# Altium PCB H_BRIGDE.PcbDoc
Units mil, origin at the board's own origin, x right, y up, seen from the top; angles counter-clockwise.
Board outline 6000 x 4000 mil, 2 copper layers (Top Layer, Bottom Layer); 53 components, 59 nets, 132 pads, 0 vias.
Unrouted connection lines stored in the file: 57.
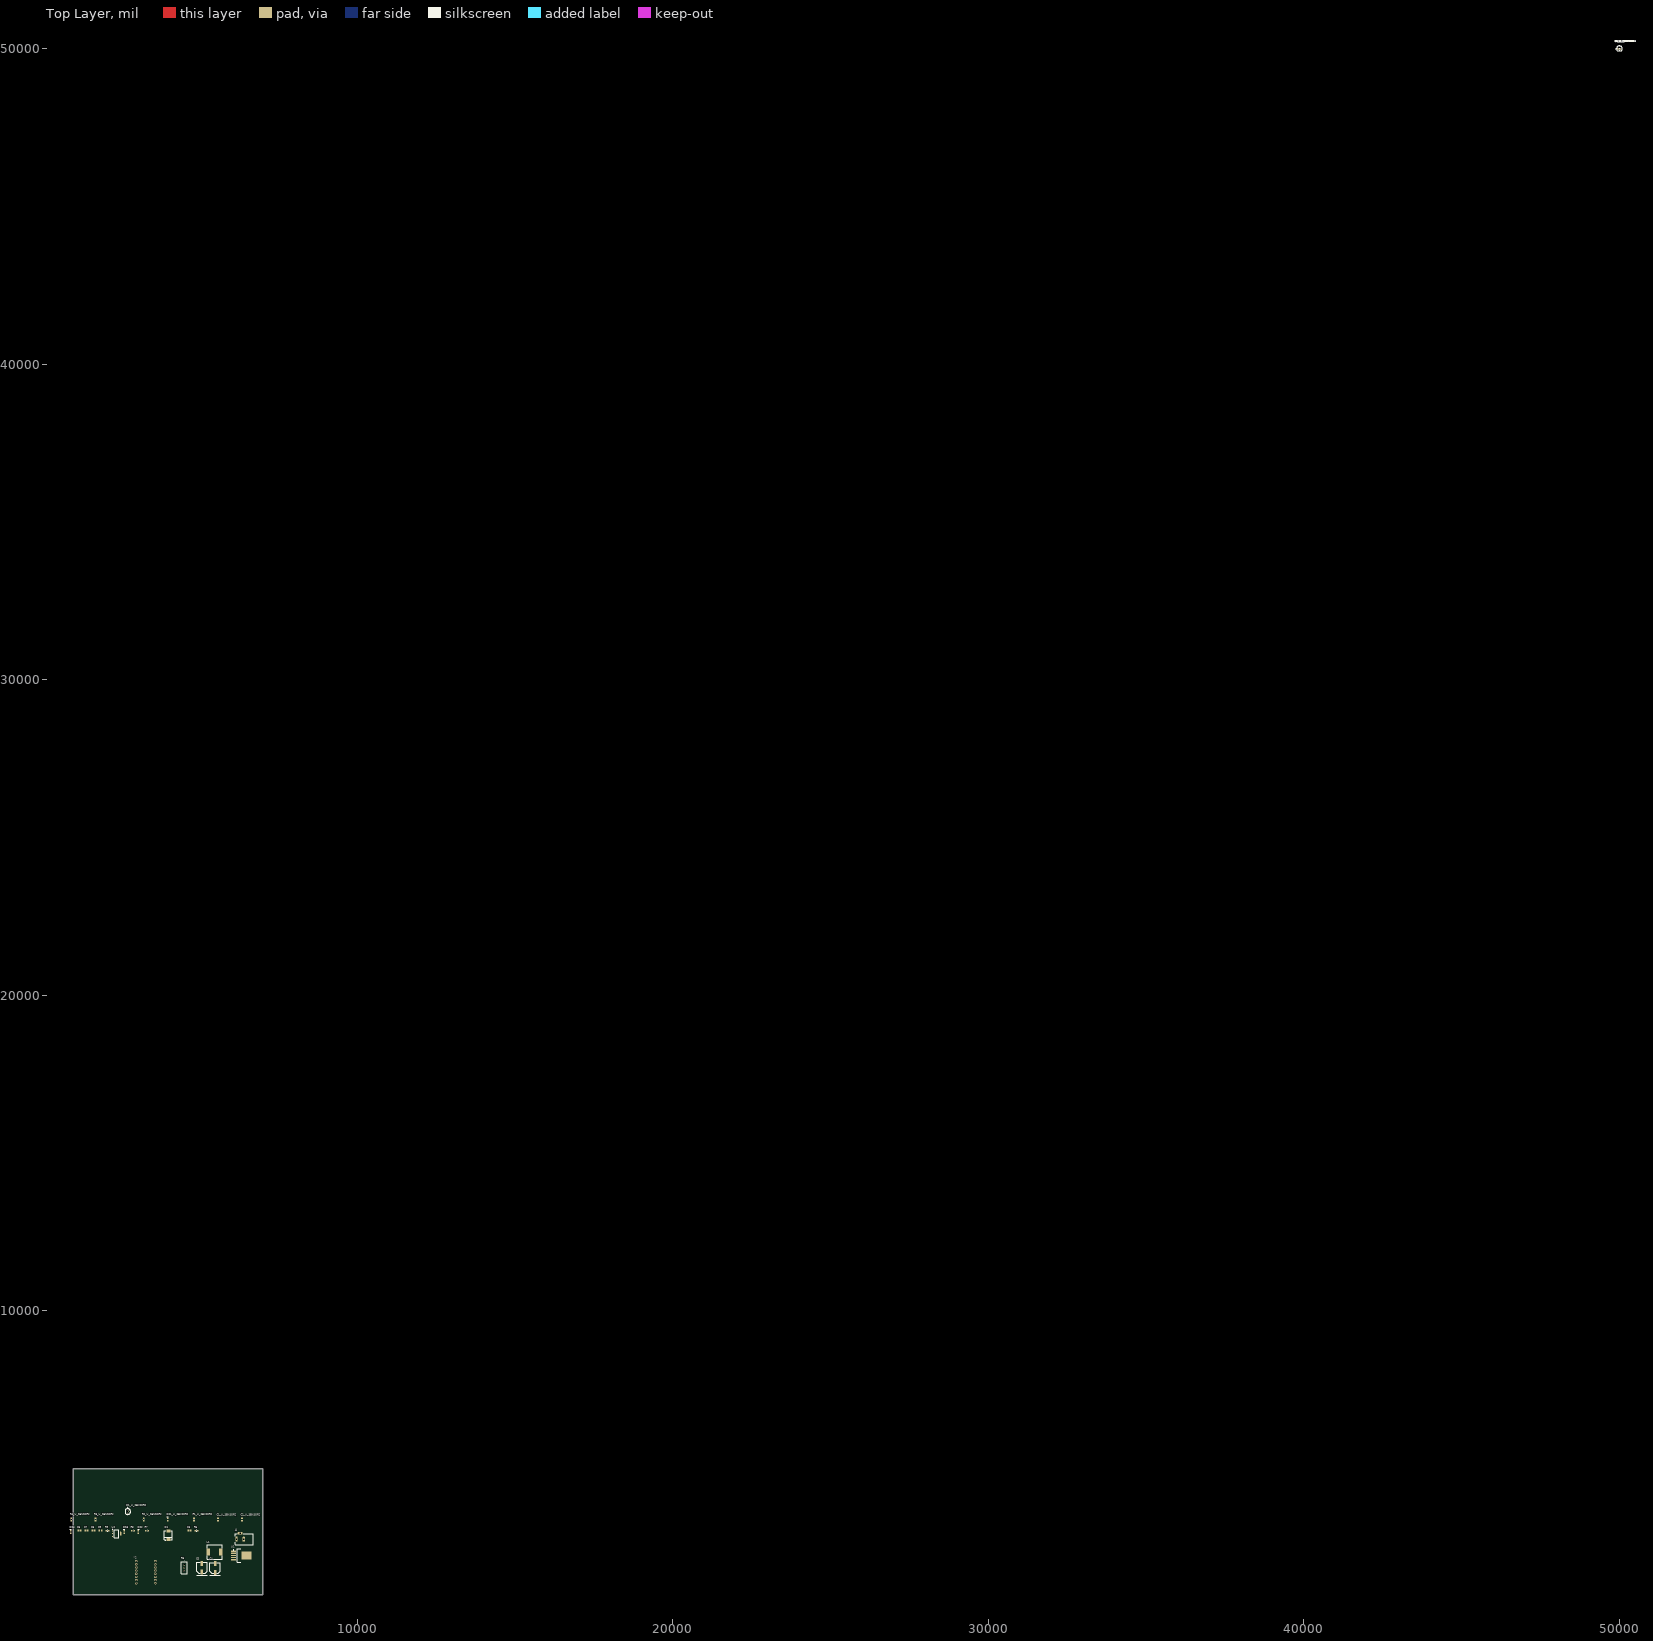
[diagram p0: Top Layer view]
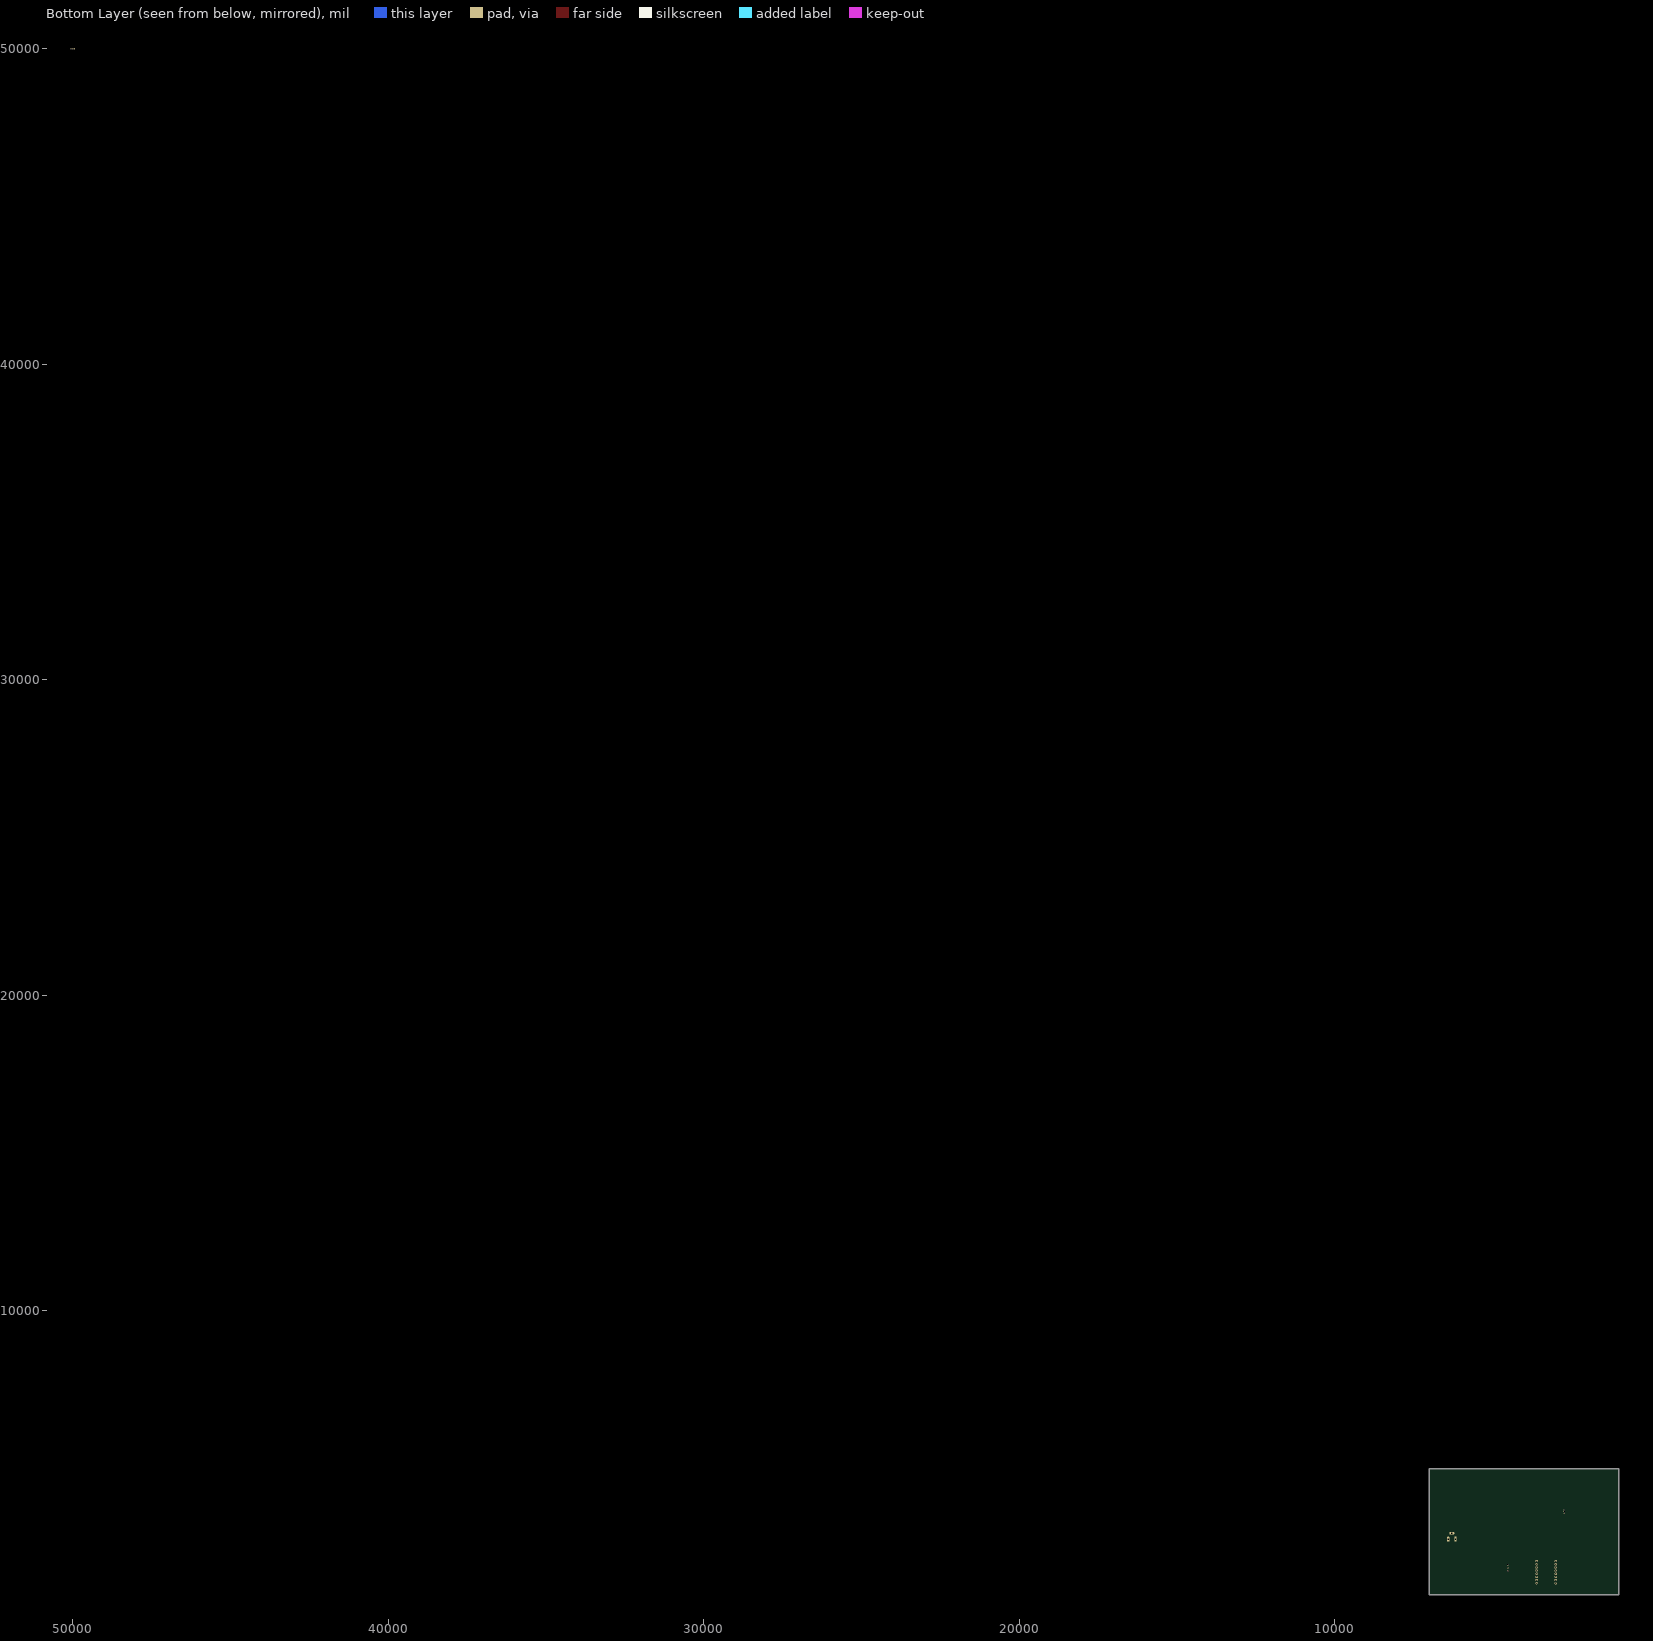
[diagram p1: Bottom Layer view, seen from below]

## Layer stack, top to bottom
Top Solder: solder mask 0.4, Solder Resist, Dk 3.5
Top Layer: signal copper 1.4
Dielectric 1: dielectric 12.6, FR-4, Dk 4.8
Bottom Layer: signal copper 1.4
Bottom Solder: solder mask 0.4, Solder Resist, Dk 3.5

## Board outline
1000,1000 7000,1000 7000,5000 1000,5000

## Design rules (kind name [scope] priority, off if disabled: settings)
Clearance [All] p1: gap=10 ignorepadtopadclearanceinfootprint=FALSE
PolygonConnect [All] p1: connectstyle=Relief reliefconductorwidth=10 reliefentries=4 polygonreliefangle="90 Angle" airgapwidth=10
RoutingVias [All] p1: holewidth=28 width=50 viastyle="Through Hole" minholewidth=28 minwidth=50 maxholewidth=28 maxwidth=50
SolderMaskExpansion [All] p1: expansion=4 istentingtop=FALSE
Width [All] p1: maxlimit=10 minlimit=10 preferedwidth=10
30 further rules are at their usual default settings.

## Classes and differential pairs
channel class SENSOR: U_SENSOR1 U_SENSOR2 U_SENSOR3 U_SENSOR4
component class U_SENSOR4: C1_U_SENSOR4 C2_U_SENSOR4 DS1_U_SENSOR4 Q1_U_SENSOR4 Q2_U_SENSOR4 R1_U_SENSOR4 R2_U_SENSOR4 R3_U_SENSOR4 R4_U_SENSOR4
component class U_SENSOR3: C1_U_SENSOR3 C2_U_SENSOR3 DS1_U_SENSOR3 Q1_U_SENSOR3 Q2_U_SENSOR3 R1_U_SENSOR3 R2_U_SENSOR3 R3_U_SENSOR3 R4_U_SENSOR3
component class U_SENSOR2: C1_U_SENSOR2 C2_U_SENSOR2 DS1_U_SENSOR2 Q1_U_SENSOR2 Q2_U_SENSOR2 R1_U_SENSOR2 R2_U_SENSOR2 R3_U_SENSOR2 R4_U_SENSOR2
component class U_SENSOR1: C1_U_SENSOR1 C2_U_SENSOR1 DS1_U_SENSOR1 Q1_U_SENSOR1 Q2_U_SENSOR1 R1_U_SENSOR1 R2_U_SENSOR1 R3_U_SENSOR1 R4_U_SENSOR1
component class MCU_SIGNAL: *1 ACC1 P1
component class Designator: C3 C4 C5 C6 C7 C8 C9 D1 DS2 DS3 DS4 J3 J4 L1 R5 R6 R7 R8 R9 S1 U1 U2

## Components (designator, comment, footprint, x,y, rotation, side; value= is the part's Value field where it differs from the comment)
*2 "Component_1" PCBComponent_1 2996.06,2070 r0 top
C1_U_SENSOR1 "100nF" CAPC2013X135X45LL10T25 49999.5,49999.5 r0 top (schematic designator C1)
C1_U_SENSOR2 "100nF" CAPC2013X135X45LL10T25 5580,3390 r90 top (schematic designator C1)
C1_U_SENSOR3 "100nF" CAPC2013X135X45LL10T25 49999.5,49999.5 r0 top (schematic designator C1)
C1_U_SENSOR4 "100nF" CAPC2013X135X45LL10T25 49999.5,49999.5 r0 top (schematic designator C1)
C2_U_SENSOR1 "100nF" CAPC2013X135X45LL10T25 49999.5,49999.5 r0 top (schematic designator C2)
C2_U_SENSOR2 "100nF" CAPC2013X135X45LL10T25 6340,3390 r90 top (schematic designator C2)
C2_U_SENSOR3 "100nF" CAPC2013X135X45LL10T25 49999.5,49999.5 r0 top (schematic designator C2)
C2_U_SENSOR4 "100nF" CAPC2013X135X45LL10T25 49999.5,49999.5 r0 top (schematic designator C2)
C3 "3.3nF" CAPC2013X135X45LL10T25 4685,3035 r0 top
C4 "470uF-16V" PNSC-FK-V-F_V 5495,1854.76 r90 top
C5 "220uF-35V" PNSC-FK-V-F_V 5070,1859.76 r90 top
C6 "100nF" CAPC2013X135X45LL10T25 1200,3035 r0 top
C7 "100nF" CAPC2013X135X45LL10T25 1420,3035 r0 top
C8 "100nF" CAPC2013X135X45LL10T25 1640,3035 r0 top
C9 "100nF" CAPC2013X135X45LL10T25 1860,3035 r0 top
D1 "SS54" FP-SMC-MFG 4010,2895 r90 top value=300pF
DS1_U_SENSOR1 "TSHA500" AVAG-HSMX-C170_V 49999.5,49999.5 r0 top (schematic designator DS1)
DS1_U_SENSOR2 "TSHA500" AVAG-HSMX-C170_V 3985,3385 r90 top (schematic designator DS1)
DS1_U_SENSOR3 "TSHA500" AVAG-HSMX-C170_V 49999.5,49999.5 r0 top (schematic designator DS1)
DS1_U_SENSOR4 "TSHA500" AVAG-HSMX-C170_V 49999.5,49999.5 r0 top (schematic designator DS1)
DS2 "White_Led" AVAG-HSMX-C170_V 3060,2995 r90 top
DS3 "White_Led" AVAG-HSMX-C170_V 2610,2995 r90 top
DS4 "White_Led" AVAG-HSMX-C170_V 915,2995 r90 top
J4 "JackDC" 694106301002 6420,2765 r90 top
L1 "68uH-3.2A" SUMI-CDRH127_V 5475,2360 r270 top
Q1_U_SENSOR1 "BS170" ONSC-TO-92-3-29-11 49999.5,49999.5 r0 top (schematic designator Q1)
Q1_U_SENSOR2 "BS170" ONSC-TO-92-3-29-11 2720,3640 r270 top (schematic designator Q1)
Q1_U_SENSOR3 "BS170" ONSC-TO-92-3-29-11 49999.5,49999.5 r0 top (schematic designator Q1)
Q1_U_SENSOR4 "BS170" ONSC-TO-92-3-29-11 49999.5,49999.5 r0 top (schematic designator Q1)
R1_U_SENSOR1 "1K" RESC2013X60X35ML10T20 49999.5,49999.5 r0 top (schematic designator R1)
R1_U_SENSOR2 "1K" RESC2013X60X35ML10T20 4820,3395 r90 top (schematic designator R1)
R1_U_SENSOR3 "1K" RESC2013X60X35ML10T20 49999.5,49999.5 r0 top (schematic designator R1)
R1_U_SENSOR4 "1K" RESC2013X60X35ML10T20 49999.5,49999.5 r0 top (schematic designator R1)
R2_U_SENSOR1 "1K" RESC2013X60X35ML10T20 49999.5,49999.5 r0 top (schematic designator R2)
R2_U_SENSOR2 "1K" RESC2013X60X35ML10T20 3230,3395 r90 top (schematic designator R2)
R2_U_SENSOR3 "1K" RESC2013X60X35ML10T20 49999.5,49999.5 r0 top (schematic designator R2)
R2_U_SENSOR4 "1K" RESC2013X60X35ML10T20 49999.5,49999.5 r0 top (schematic designator R2)
R3_U_SENSOR1 "1K" RESC2013X60X35ML10T20 49999.5,49999.5 r0 top (schematic designator R3)
R3_U_SENSOR2 "1K" RESC2013X60X35ML10T20 1705,3395 r90 top (schematic designator R3)
R3_U_SENSOR3 "1K" RESC2013X60X35ML10T20 49999.5,49999.5 r0 top (schematic designator R3)
R3_U_SENSOR4 "1K" RESC2013X60X35ML10T20 49999.5,49999.5 r0 top (schematic designator R3)
R4_U_SENSOR1 "1K" RESC2013X60X35ML10T20 49999.5,49999.5 r0 top (schematic designator R4)
R4_U_SENSOR2 "1K" RESC2013X60X35ML10T20 935,3395 r90 top (schematic designator R4)
R4_U_SENSOR3 "1K" RESC2013X60X35ML10T20 49999.5,49999.5 r0 top (schematic designator R4)
R4_U_SENSOR4 "1K" RESC2013X60X35ML10T20 49999.5,49999.5 r0 top (schematic designator R4)
R5 "2K" RESC2013X60X35ML10T20 4905,3035 r0 top
R6 "3296W-1-504LF" FP-3296W-MFG 4515.2,1860 r90 top value=500kΩ
R7 "2K" RESC2013X60X35ML10T20 3340,3035 r0 top
R8 "1k" RESC2013X60X35ML10T20 2895,3035 r0 top
R9 "2K" RESC2013X60X35ML10T20 2080,3035 r0 top
U1 "LM2596SX-ADJ/NOPB" KTT0005B_L 6320,2250 r0 top
U2 "AMS1117-3.3" FP-AMS1117-IPC_C 2370,2940 r0 top

## Footprints (in the part's own frame and the unit in brackets; to place one, negate y for a bottom-side part, rotate by r counter-clockwise, add the part's x,y. Pads: shape width x height; smd on the part's side, far side on the other; paste and mask are expansions set on the pad)
694106301002 [mm] "DC Power Jack Right Angled(6.4)"
  rrect50% 4x1.8 hole 0.8 square: 1(0,6.35) 2(0,0.55)
  rrect50% 1.8x4 hole 0.8 square: 3(4.8,3.35)
  silkscreen extent -4.5,-7.25 4.5,7.25, body extent -4.5,-7.25 5,7.25, height 10.75
AVAG-HSMX-C170_V [mm] "SMD, 2-Leads, Body 2x1.25mm, Height 0.8mm"
  rect 1.2x1.2 smd: 1(-1.05,0) 2(1.05,0)
  silkscreen extent 2.15,-0.63 2.15,0.63, body extent -1,-0.63 1,0.63, height 0.8
CAPC2013X135X45LL10T25 [mm] "Chip Capacitor, 2-Leads, Body 2.10x1.35mm, IPC High Density"
  rect 1.4x1.5 smd: 1(-0.95,0) 2(0.95,0)
  body extent -1.05,-0.67 1.05,0.67, height 1.35
FP-3296W-MFG [mm]
  rect 1.2x1.2 hole 0.7 paste-2539.97 mask+0: 1(2.54,0.005)
  round 1.2 hole 0.7 paste-2539.97 mask+0: 2(0,0.005) 3(-2.54,0.005)
  silkscreen extent -4.89,-2.48 5.77,2.48, body extent -4.99,-2.58 4.99,2.58, height 0.25
FP-AMS1117-IPC_C [mm]
  rect 1.004x0.872 smd paste+0 mask+0: 1(-3.295,2.29)
  rrect100% 1.004x0.872 smd paste+0 mask+0: 2(-3.295,0) 3(-3.295,-2.29)
  rrect87% 1.004x3.182 smd paste+0 mask+0: 4(3.295,0)
  silkscreen extent -3.42,-3.25 1.75,3.62, body extent -3.9,-3.35 3.9,3.35, height 0.25
FP-SMC-MFG [mm]
  rect 2.5x3.3 smd paste+0 mask+0: 1(-3.45,0) 2(3.45,0)
  silkscreen extent -4.25,-3.11 3.55,3.11, body extent -4.8,-3.21 4.8,3.21, height 0.25
KTT0005B_L [mm] "DPAK, 5-Leads, Body 10.65x9.65mm, Pitch 1.7mm, IPC High Density"
  rrect11% 3.85x0.95 smd: 1(-6.2,3.4) 2(-6.2,1.7) 3(-6.2,0) 4(-6.2,-1.7) 5(-6.2,-3.4)
  rrect2% 7.9x6.4 smd: 6(4.15,0)
  silkscreen extent -6.32,-5.35 -0.2,5.35, body extent -3.2,-5.32 6.45,5.33, height 4.83
ONSC-TO-92-3-29-11 [mm] "TO, 3-Leads, Body Dia 4.7mm, Pitch 1.27mm"
  rect 1.05x1.05 hole 0.8: 1(-1.27,0)
  round 1.05 hole 0.8: 2(0,0) 3(1.27,0)
  silkscreen extent -3.07,-1.34 2.35,2.35, body extent -2.35,-1.33 2.36,2.36, height 7.87
PCBComponent_1 [mm]
  oval 1.924x1.724 hole 1.299: 1(0,0) 2(0,-2.54) 3(0,-5.08) 4(0,-7.62) 5(0,-10.16) 6(0,-12.7) 7(0,-15.24) 8(0,-17.907) 9(15.34,-17.78) 10(15.34,-15.24) 11(15.34,-12.7) 12(15.34,-10.16) 13(15.34,-7.62) 14(15.34,-5.08) 15(15.34,-2.54) 16(15.34,0)
  body extent -2.41,-19.18 17.91,1.14, height 3.01
PNSC-FK-V-F_V [mm] "CAPAE, 2-Leads, Body 8.50x8.50mm"
  rect 4x2 smd: 1(-3.55,0) 2(3.55,0)
  silkscreen extent -6.05,-4.25 4.25,4.25, body extent -5,-4.25 5,4.25, height 10.5
RESC2013X60X35ML10T20 [mm] "Chip Resistor, 2-Leads, Body 2.1x1.35mm, IPC Low Density"
  rect 1.2x1.45 smd: 1(-1,0) 2(1,0)
  silkscreen extent -0.1,-0.63 0.1,0.63, body extent -1.05,-0.68 1.05,0.67, height 0.6
SUMI-CDRH127_V [mm] "SMD, 2-Leads, Body 12x12mm"
  rect 5.4x2.9 smd: 1(0,4.95) 2(0,-4.95)
  silkscreen extent -6,-6 6,6, body extent -6,-6.1 6,6.1, height 8.4

## Part data
C1_U_SENSOR1 C1_U_SENSOR2 C1_U_SENSOR3 C1_U_SENSOR4 C2_U_SENSOR1 C2_U_SENSOR2 C2_U_SENSOR3 C2_U_SENSOR4 C3 C6 C7 C8 C9: library part CMP-1662-00015-2, "Chip Capacitor, 4.7 uF, +/- 10%, 16 V, -55 to 85 degC, 0805 (2012 Metric), RoHS, Tape and Reel", Capacitance="4.7 uF", Case Code (Imperial)=0805, Case Code (Metric)=2012, Max Operating Temperature="85 degC", Min Operating Temperature="-55 degC", Package Quantity=3000, PartNumber=GRM21BR61C475KA88L, Tolerance=10%, Type (Capacitors)=X5R, Voltage Rating="16 V", Case\/Package=0805, ComponentLink1Description="Manufacturer URL", ComponentLink1URL=http://www.murata.com/, ComponentLink2Description=Datasheet, ComponentLink2URL=http://search.murata.co.jp/Ceramy/image/img/A01X/G101/ENG/GRM21BR61C475KA88-01.pdf, DatasheetVersion=03/2016, Height="1.25 mm", Length="2 mm", Mount="Surface Mount", Mounting Technology="Surface Mount", PackageDescription="2-Pin Surface Mount Device, Body 2 x 1.25 mm", PackageReference=0805, Packaging="Tape and Reel", Pins=2, Radiation Hardening=No, REACH SVHC="No SVHC", RoHSCompliant=true, Voltage Rating (DC)="16 V", Width="1.25 mm"
C4 C5: library part CMP-2000-06204-1, "Aluminum Electrolytic Capacitor, 470 uF, +/- 20%, 16 V, 2-Pin SMD (Size Code F), -55 to 105 degC, RoHS, Tape and Reel", Capacitance=470µF, Case Size/Dimension=Ø8x10.2mm, Lifetime@Temperature=2000Hrs@105°C, Manufacturer=Panasonic, Operating Temp Range=-55to+105°C, Operating Temp-Max=105°C, Package Description="2-Pin Electrolytic Aluminum Capacitor, Body 8.3 x 8.3 mm", Package Reference=FK-V-F, Rated Voltage=16V, Ripple Current=600mA, Datasheet URL=http://industrial.panasonic.com/cdbs/www-data/pdf/RDE0000/ABA0000C1181.pdf, Datasheet Version=03/2016, Impedance=0.16O, Manufacturer URL=http://www.panasonic.com/, Mounting Technology=SurfaceMount, Package URL=http://industrial.panasonic.com/cdbs/www-data/pdf/RDE0000/DME0000COL48.pdf, Series=FK, Type=Can
D1: library part CMP-2000-05097-3, "DIODE SCHOTTKY 40V 5A SMC", Capacitance=300pF, Forward Current=5A, Manufacturer="Diodes Inc.", Manufacturer Part Number=B540C-13-F, Max Junction Temp=+150°C, Max Repetitive Reverse Voltage=40V, Max Surge Forward Current=100A, Package=SMC, Peak Reverse Current=0.5mA, Temperature="-55°C to +150°C", Temperature Range Low=-55°C, Automotive=No, Automotive Grade=NA, Category=Diode, ComponentLink2Description=Datasheet, ComponentLink2URL=https://www.diodes.com/assets/Datasheets/ds13012.pdf, Device Class L1="Discrete Semiconductors", Device Class L2=Diodes, Device Class L3="Schottky Diodes", Digikey Description="DIODE SCHOTTKY 40V 5A SMC", Footprint Url=https://www.diodes.com/assets/Package-Files/SMC.pdf, Height=2.5mm, Lead Free=Yes, Mouser Description="Diode: Schottky rectifying; SMD; 40V; 5A; SMC; Package: reel, tape", Octopart=https://octopart.com/b540c-13-f-diodes+inc.-325873, Reverse Voltage=40V, RoHS=TRUE, Standoff Height=0.1mm, Temperature Range High=+150°C
DS1_U_SENSOR1 DS1_U_SENSOR2 DS1_U_SENSOR3 DS1_U_SENSOR4 DS2 DS3 DS4: library part CMP-2000-05062-1, "Chip LED, Green, 2.2 V, -40 to 85 degC, 2-Pin SMD, Pb-Free, Tape and Reel", Forward Current If=20mA, Forward Voltage=2.2V, Forward Voltage VF Max=2.6V, LED Colour=Green, Manufacturer=Avago, Operating Temperature Max=85degC, Operating Temperature Min=-30degC, Operating Temperature Range=-30degCto+85degC, Opto Case Style=SMD, Package Description="2-Pin Surface Mount Device, Body 2 x 1.25 mm, Height 0.8 mm", Package Reference=HSMX-C170, Storage Temperature Min=-40degC, Bulb Size=1.25mmx1.4mm, Datasheet URL=https://datasheet.ciiva.com/29280/180495-da-01-en-chip-led-hsmg-c170-gelb-gruen-29280971.pdf, Datasheet Version=Oct-08, Dominant Wavelength=572nm, Dominant Wavelength Typ=572nm, External Depth=0.8mm, External Length / Height=2mm, External Width=1.25mm, Forward Current If Max=20mA, LED Mounting=SMD, LED Type=Standard, Lens Shape=Rectangular, Light Area Height=1mm, Luminous Intensity=15mcd, Luminous Intensity Min=4mcd, Luminous Intensity Typ=15mcd, Manufacturer URL=http://www.avagotech.com/, Mounting Type=SMD, MSL=MSL2A-4weeks, No. of Pins=2, Opto Mounting Orientation=Top, Packaging=CutTape, Peak Forward Current=20mA, Peak Wavelength=570nm, PIV Max=5V, Storage Temperature Max=85degC, SVHC=NoSVHC(16-Jun-2014), Viewing Angle=170deg, Voltage Vf Typ=2.2V, Wavelength Typ=570nm
J4: library part CMP-1502-00188-2, Color=Black, Current Rating=5A, Flammability Rating="UL94 V-0", Insulation Resistance=100MΩ, Max Operating Temperature=85°C, Min Operating Temperature=-40°C, Operating Supply Voltage=24V, Voltage Rating (DC)=20V, Connector Type=Power, Contact Gender=Female, Contact Material="Gold, Tin", Contact Plating=Tin, Gender=Male, Height=11mm, Housing Material=Polyamide, Mount="Through Hole", NexarPartId=52676100, Number of Contacts=3, Packaging=Bulk, REACH SVHC=Unknown, RoHS=Compliant, Shielding=Unshielded, Termination="Through Hole", Voltage Rating=24V
L1: library part CMP-2000-06084-1, "Power Inductor, 10 uH, +/- 20%, -40 to 100 degC, 2-Pin SMD, RoHS, Tape and Reel", Current - Saturation=-, Current Rating=5.4A, DC Resistance (DCR)=21.6mOhmMax, Frequency - Test=1kHz, Inductance=10µH, Manufacturer=Sumida, Operating Temperature=-40°C~100°C, Package / Case=Nonstandard, Package Description="2-Pin Surface Mount Device, Body 12 x 12 mm", Package Reference=CDRH127, Standard Package=1, Tolerance=±20%, Catalog Drawings=CDRH127SeriesFrontCDRH127SeriesSideCDRH127SeriesBottom, Category=Inductors,Coils,Chokes, Datasheet URL=http://products.sumida.com/products/pdf/CDRH127.pdf, Datasheet Version=01/2014, Family=FixedInductors, Frequency - Self Resonant=-, Height - Seated (Max)="0.315\"(8.00mm)", Manufacturer URL=http://www.sumida.com/, Material - Core=-, Mounting Technology=SurfaceMount, Mounting Type=SurfaceMount, Online Catalog=CDRHSeries, Other Names=308-1457-1, Packaging=CutTape(CT), Product Training Modules=PowerInductorBasics, Q @ Freq=-, Ratings=-, Series=CDRH127, Shielding=Shielded, Size / Dimension="0.472\"Lx0.472\"W(12.00mmx12.00mm)", Type=-
Q1_U_SENSOR1 Q1_U_SENSOR2 Q1_U_SENSOR3 Q1_U_SENSOR4: library part CMP-1058-00929-1, "Small Signal MOSFET, 500 mA, 60 V, N-Channel, 3-Pin TO-92, Bulk Box", Manufacturer="On Semiconductor", Package Type=TO-92, Channel Polarity="N Channel", ComponentLink1Description="Manufacturer URL", ComponentLink1URL=http://www.onsemi.com/, ComponentLink2Description=Datasheet, ComponentLink2URL=http://www.onsemi.com/pub_link/Collateral/BS170-D.PDF, ComponentLink3Description="Package Specification", ComponentLink3URL=http://www.onsemi.cn/pub_link/Collateral/2N6426-D.PDF, Configuration=Single, DatasheetVersion="Rev. 6", ID Max (A)=0.5, Mounting Technology="Through Hole", PackageDescription="3-Pin Transistor Outline, Body 4.825 x 3.685 mm, Pitch 1.27 mm", PackageReference=TO-92-3-29-11_AM_SL, PackageVersion="Rev. AM", Packing="Bulk Box", PartNumber=BS170, PD Max (W)=0.35, V(BR)DSS Min (V)=60, VGS Max (V)=20, VGS(th) Max (V)=3
R1_U_SENSOR1 R1_U_SENSOR2 R1_U_SENSOR3 R1_U_SENSOR4 R2_U_SENSOR1 R2_U_SENSOR2 R2_U_SENSOR3 R2_U_SENSOR4 R3_U_SENSOR1 R3_U_SENSOR2 R3_U_SENSOR3 R3_U_SENSOR4 R4_U_SENSOR1 R4_U_SENSOR2 R4_U_SENSOR3 R4_U_SENSOR4 R5 R7 R8 R9: library part CMP-2100-03671-1, "Chip Resistor, 1 KOhm, +/- 1%, 125 mW, -55 to 155 degC, 0805 (2012 Metric), RoHS, Tape and Reel", Case Code (Imperial)=0805, Case Code (Metric)=2012, Manufacturer=Yageo, Max Operating Temperature=155degC, Max Power Dissipation=125mW, Min Operating Temperature=-55degC, Package Description="2-Pin Surface Mounted Device, Body 2 x 1.25 mm", Package Quantity=1, Resistance=1KOhm, Temperature Coefficient=100ppm/degreesC, Tolerance=1%, Voltage Rating=150V, Case/Package=0805, Composition=ThickFilm, Datasheet URL=http://www.yageo.com/NewPortal/yageodocoutput?fileName=/pdf/R-Chip/PYu-RC_Group_51_RoHS_L_5.pdf, Datasheet Version="Rev. 5, 10/2016", Depth=1.25mm, Height=0.024inch, Lead Free=LeadFree, Length=0.079inch, Manufacturer URL=http://www.yageo.com/, Military Standard=Not, Number of Pins=2, Number of Terminations=2, Package Reference=0805, Packaging=TapeandReel, Power Rating=125mW, REACH SVHC=Unknown, RoHSCompliant=true, Termination=SMD/SMT, Voltage Rating (DC)=150V, Width=0.049inch
R6: library part CMP-2000-05583-2, "TRIMMER 500K OHM 0.5W PC PIN TOP", Manufacturer=Bourns, Package=3296W, Power Rating=0.5W, Resistance=500kΩ, Temperature="-55°C to +125°C", Temperature Coefficient=100ppm/°C, Temperature Range High=+125°C, Temperature Range Low=-55°C, Tolerance=10%, Voltage Rating=300V, Automotive=No, Category=Res, ComponentLink2Description=Datasheet, ComponentLink2URL=https://www.bourns.com/docs/Product-Datasheets/3296.pdf, Device Class L1="Passive Components", Device Class L2=Resistors, Device Class L3="Variable Resistors and Potentiometers", Digikey Description="TRIMMER 500K OHM 0.5W PC PIN TOP", Height=12.05mm, Lead Free=Yes, Manufacturer Part Number=3296W-1-504LF, Mouser Description="Trimmer; Cermet; Rest 500 Kilohms; PCB; 25 Turns; Pwr-Rtg 0.5W", Octopart=https://octopart.com/3296w-1-504lf-bourns-143884, RoHS=TRUE, Series="Trimpot 3296-Sealed", Standoff Height=0.38mm
U1: library part CMP-2000-06545-1, "Simple Switcher(R) Power Converter 150 kHz Step-Down Voltage Regulator, 3 A, 4.5 to 40 V, -40 to 125 degC, 5-Pin TO-263 (KTT), Green (RoHS & no Sb/Br), Tape and Reel", Manufacturer="Texas Instruments", Operating Temperature Max=125°C, Operating Temperature Min=-40°C, Operating Temperature Range=-40°Cto+125°C, Output Current=3A, Output Voltage=37V, Package Description="5-Pin Plastic Flange Mount, Body 10.16 x 8.925 mm, Pitch 1.7 mm", Package Reference=KTT5, Package Version="4200577-4/G, 01/2013", PartNumber=LM2596, Primary Input Voltage=40V, Voltage Regulator Case Style=TO-263, Datasheet URL=http://www.ti.com/lit/ds/symlink/lm2596.pdf, Datasheet Version="Rev. C, 04/2013", Manufacturer URL=http://www.ti.com/, Mounting Technology=SurfaceMount, MSL=MSL3-168hours, No. of Outputs=1, No. of Pins=5, Number of Outputs=1, Package URL=http://www.ti.com/litv/pdf/mpsf007e, SVHC=NoSVHC(19-Dec-2012)
U2: library part CMP-209535-000001-1, "LDO Voltage Regulators 1A, 3.3V", Dropout Voltage=1.1V, Manufacturer="Advanced Monolithic Systems", Max Junction Temp=+125°C, Max Power Dissipation=1.2W, Max Supply Voltage=15V, Nominal Supply Current=5mA, Output Current=1A, Output Voltage=3.3V, Package=AMS1117, Temperature="-40°C to +125°C", Temperature Range Low=-40°C, Automotive=No, Category=IC, ComponentLink2Description=Datasheet, ComponentLink2URL=http://www.advanced-monolithic.com/pdf/ds1117.pdf, Device Class L1="Integrated Circuits (ICs)", Device Class L2="Power Management ICs", Device Class L3="Voltage Regulators - Linear", Height=1.8mm, Ipc Land Pattern Name=SOT229P700X180-4, Lead Free=Yes, Manufacturer Part Number=AMS1117-3.3, Number of Outputs=1, Octopart=https://octopart.com/ams1117-3.3-advanced+monolithic+systems-25899300, Output Type=Fixed, RoHS=TRUE, Standoff Height=0.64mm, Temperature Range High=+125°C

## Nets (pads, with @x,y where several pads share a name; then routed paths per layer and width w, separated by ;. In a path a pad name is that pad's centre, name@x,y a point inside that pad or via, vN(x,y) a via of type N, cw(c..) or ccw(c..) an arc to the next point about the centre after c; other vN are vias at no path point)
5V: *2.2 C8.2 C9.2 R9.2 U2.2 U2.4
5V_U_SENSOR1: C1_U_SENSOR1.2 C2_U_SENSOR1.2 R1_U_SENSOR1.2
5V_U_SENSOR2: C1_U_SENSOR2.2 C2_U_SENSOR2.2 R1_U_SENSOR2.2
5V_U_SENSOR3: C1_U_SENSOR3.2 C2_U_SENSOR3.2 R1_U_SENSOR3.2
5V_U_SENSOR4: C1_U_SENSOR4.2 C2_U_SENSOR4.2 R1_U_SENSOR4.2
A01: *2.4
A02: *2.5
B01: *2.6
B02: *2.7
EN: 
FB: C3.1 R6.2 R8.2 U1.4
GND: *2.3 *2.8 *2.9 C4.2 C5.2 C6.1 C7.1 C8.1 C9.1 D1.2 DS2.2 DS3.2 DS4.2 J4.2 J4.3 R8.1 U1.3 U1.5 U1.6 U2.1
GND_U_SENSOR1: C1_U_SENSOR1.1 C2_U_SENSOR1.1 Q1_U_SENSOR1.3 R3_U_SENSOR1.1 R4_U_SENSOR1.1
GND_U_SENSOR2: C1_U_SENSOR2.1 C2_U_SENSOR2.1 Q1_U_SENSOR2.3 R3_U_SENSOR2.1 R4_U_SENSOR2.1
GND_U_SENSOR3: C1_U_SENSOR3.1 C2_U_SENSOR3.1 Q1_U_SENSOR3.3 R3_U_SENSOR3.1 R4_U_SENSOR3.1
GND_U_SENSOR4: C1_U_SENSOR4.1 C2_U_SENSOR4.1 Q1_U_SENSOR4.3 R3_U_SENSOR4.1 R4_U_SENSOR4.1
Net*2_10: *2.10
Net*2_11: *2.11
Net*2_12: *2.12
Net*2_13: *2.13
Net*2_14: *2.14
Net*2_15: *2.15
Net*2_16: *2.16
NetC3_2: C3.2 C5.1 L1.2 R5.2 R6.3
NetD1_1: D1.1 L1.1 U1.2
NetDS1_U_SENSOR1_1: DS1_U_SENSOR1.1 R1_U_SENSOR1.1
NetDS1_U_SENSOR1_2: DS1_U_SENSOR1.2 Q1_U_SENSOR1.1
NetDS1_U_SENSOR2_1: DS1_U_SENSOR2.1 R1_U_SENSOR2.1
NetDS1_U_SENSOR2_2: DS1_U_SENSOR2.2 Q1_U_SENSOR2.1
NetDS1_U_SENSOR3_1: DS1_U_SENSOR3.1 R1_U_SENSOR3.1
NetDS1_U_SENSOR3_2: DS1_U_SENSOR3.2 Q1_U_SENSOR3.1
NetDS1_U_SENSOR4_1: DS1_U_SENSOR4.1 R1_U_SENSOR4.1
NetDS1_U_SENSOR4_2: DS1_U_SENSOR4.2 Q1_U_SENSOR4.1
NetDS2_1: DS2.1 R5.1
NetDS3_1: DS3.1 R7.1
NetDS4_1: DS4.1 R9.1
NetJ1_3: 
NetJ1_4: 
NetJ2_3: 
NetJ2_4: 
NetQ1_U_SENSOR1_2: Q1_U_SENSOR1.2 R2_U_SENSOR1.1 R3_U_SENSOR1.2
NetQ1_U_SENSOR2_2: Q1_U_SENSOR2.2 R2_U_SENSOR2.1 R3_U_SENSOR2.2
NetQ1_U_SENSOR3_2: Q1_U_SENSOR3.2 R2_U_SENSOR3.1 R3_U_SENSOR3.2
NetQ1_U_SENSOR4_2: Q1_U_SENSOR4.2 R2_U_SENSOR4.1 R3_U_SENSOR4.2
NetQ2_U_SENSOR1_1: R4_U_SENSOR1.2
NetQ2_U_SENSOR2_1: R4_U_SENSOR2.2
NetQ2_U_SENSOR3_1: R4_U_SENSOR3.2
NetQ2_U_SENSOR4_1: R4_U_SENSOR4.2
NetR2_U_SENSOR1_2: R2_U_SENSOR1.2
NetR2_U_SENSOR2_2: R2_U_SENSOR2.2
NetR2_U_SENSOR3_2: R2_U_SENSOR3.2
NetR2_U_SENSOR4_2: R2_U_SENSOR4.2
NetR7_2: R7.2
RX: 
STATE: 
TX: 
VCC: 
Vin: C4.1 J4.1 U1.1
VM: *2.1 C6.2 C7.2 U2.3
pads on no net: R6.1